# EAGLE board 511_outin_things_imx7 (EAGLE 9.2.2)
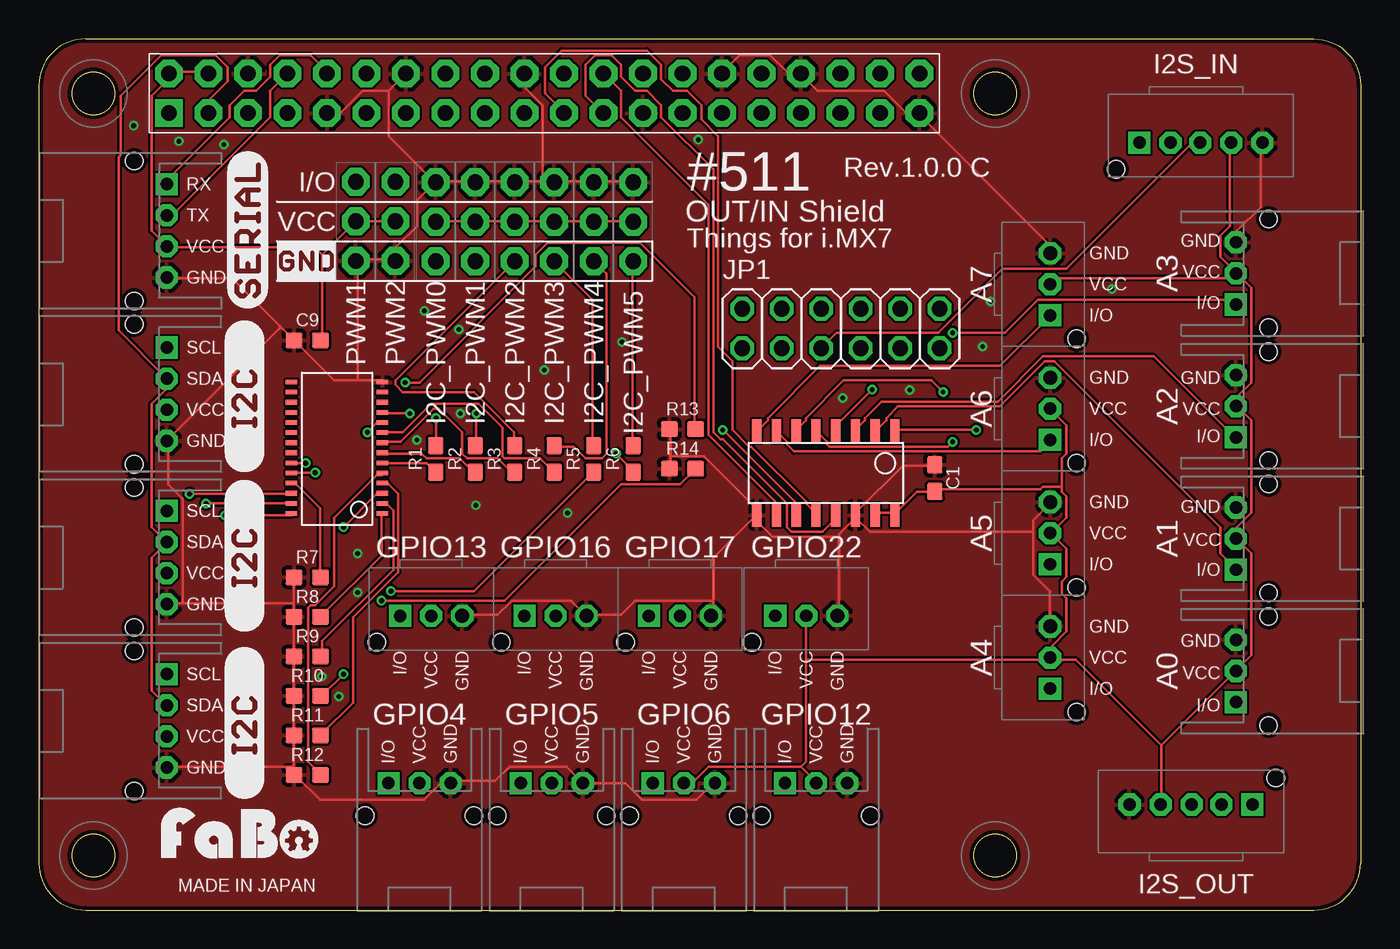
[diagram p0: board, top side]
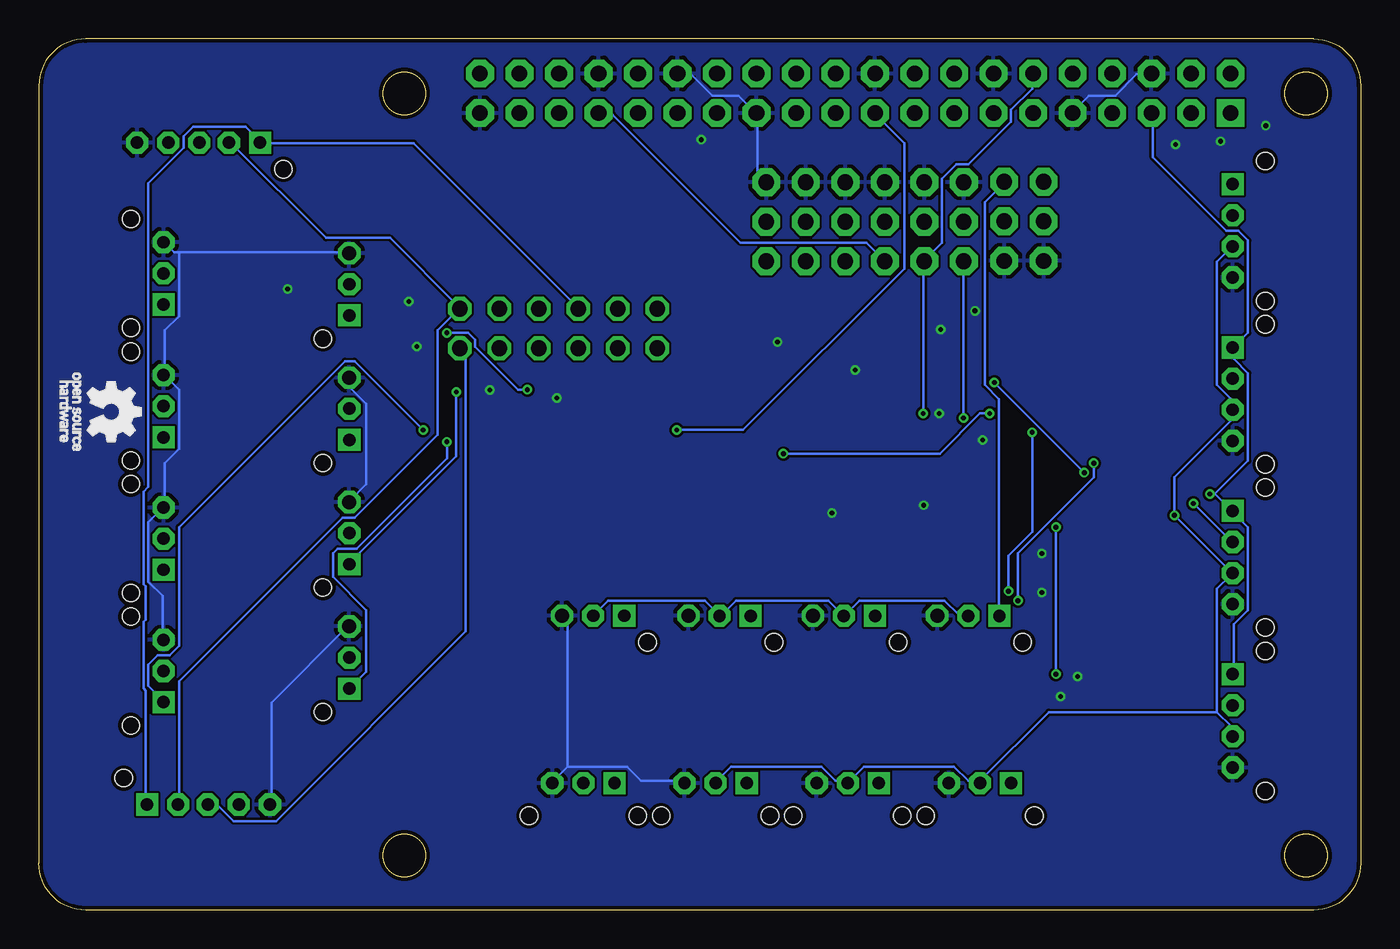
[diagram p1: board, bottom side, seen from below]

Size 85 x 56 mm. Coordinates in mm from the lower left corner, seen from the top.
Copper layers (1*16): Top 0.035mm / dielectric 1.5mm / Bottom 0.035mm
Design rules "Elecrow_2-layer_eagle_rule": minimum track width 6mil, minimum drill 12mil, track to track 6mil, track to pad 6mil, pad to pad 6mil, via to via 6mil, smd to smd 0mil, copper to edge 10mil, drill to drill 10mil, minimum pad ring 10mil, minimum via ring 6mil, stop-mask expansion 2mil, vias tented up to drill 100mil, thermal gap 10mil

## Footprints (pad centres in the part's own frame; a part is rotated, then mirrored left to right if it is on the bottom)
FABO_BRICK_3PIN_S03B-PASK-2 = drill 0.8 pad 1.422 octagon: GND -2,0; VCC 0,0 | drill 0.8 pad 1.422 square: I/O 2,0 | hole 1.1: 3.5,2.1; -3.5,2.1
FABO_BRICK_3PIN_B03B-PASK-1 = drill 0.9 pad 1.422 octagon: GND -2,0 | drill 0.8 pad 1.422 square: I/O 2,0 | drill 0.8 pad 1.422 octagon: VCC 0,0 | hole 1.1: 3.5,1.7
0603 = smd 1.1 x 1: 1 -0.85,0; 2 0.85,0
FABO_BRICK_3PIN_HEADER = drill 1 pad 1.778 octagon: GND -2.54,0; I/O 2.54,0; VCC 0,0
FABO_BRICK_I2C_S04B-PASK-2 = drill 0.8 pad 1.422 octagon: GND -3,0; SDA 1,0; VCC -1,0 | drill 0.8 pad 1.422 square: SCL 3,0 | hole 1.1: 4.5,2.1; -4.5,2.1
FABO_BRICK_I2S_B05B-PARK-1 = drill 0.8 pad 1.422 octagon: BCLK 1.635,2.54; DATA -0.27,2.54; GND -4.27,2.54; VCC -2.27,2.54 | drill 0.8 pad 1.422 square: WS 3.635,2.54 | hole 1.1: 5.135,4.24
MICROCHIP-MCP3008 = smd 0.6 x 1.5: 1 -4.445,-2.7; 2 -3.175,-2.7; 3 -1.905,-2.7; 4 -0.635,-2.7; 5 0.635,-2.7; 6 1.905,-2.7; 7 3.175,-2.7; 8 4.445,-2.7; 9 4.445,2.7; 10 3.175,2.7; 11 1.905,2.7; 12 0.635,2.7; 13 -0.635,2.7; 14 -1.905,2.7; 15 -3.175,2.7; 16 -4.445,2.7
2X06 = drill 1.016 octagon: 1 -6.35,-1.27; 2 -6.35,1.27; 3 -3.81,-1.27; 4 -3.81,1.27; 5 -1.27,-1.27; 6 -1.27,1.27; 7 1.27,-1.27; 8 1.27,1.27; 9 3.81,-1.27; 10 3.81,1.27; 11 6.35,-1.27; 12 6.35,1.27
FABO_BRICK_SERIAL_S04B-PASK-2 = drill 0.8 pad 1.422 octagon: GND -3,0; TX 1,0; VCC -1,0 | drill 0.8 pad 1.422 square: RX 3,0 | hole 1.1: 4.5,2.1; -4.5,2.1
RASPBERRY_PI_B+ = drill 1 pad 1.778 square: 1 0,-2.54 | drill 1 pad 1.778 octagon: 2 0,0; 3 2.54,-2.54; 4 2.54,0; 5 5.08,-2.54; 6 5.08,0; 7 7.62,-2.54; 8 7.62,0; 9 10.16,-2.54; 10 10.16,0; 11 12.7,-2.54; 12 12.7,0; 13 15.24,-2.54; 14 15.24,0; 15 17.78,-2.54; 16 17.78,0; 17 20.32,-2.54; 18 20.32,0; 19 22.86,-2.54; 20 22.86,0; 21 25.4,-2.54; 22 25.4,0; 23 27.94,-2.54; 24 27.94,0; 25 30.48,-2.54; 26 30.48,0; 27 33.02,-2.54; 28 33.02,0; 29 35.56,-2.54; 30 35.56,0; 31 38.1,-2.54; 32 38.1,0; 33 40.64,-2.54; 34 40.64,0; 35 43.18,-2.54; 36 43.18,0; 37 45.72,-2.54; 38 45.72,0; 39 48.26,-2.54; 40 48.26,0
PCA9685 = smd 0.3 x 0.75: 1 -4.15,-2.93; 2 -3.5,-2.93; 3 -2.85,-2.93; 4 -2.2,-2.93; 5 -1.55,-2.93; 6 -0.9,-2.93; 7 -0.25,-2.93; 8 0.4,-2.93; 9 1.05,-2.93; 10 1.7,-2.93; 11 2.35,-2.93; 12 3,-2.93; 13 3.65,-2.93; 14 4.3,-2.93; 15 4.3,2.92; 16 3.65,2.92; 17 3,2.92; 18 2.35,2.92; 19 1.7,2.92; 20 1.05,2.92; 21 0.4,2.92; 22 -0.25,2.92; 23 -0.9,2.92; 24 -1.55,2.92; 25 -2.2,2.92; 26 -2.85,2.92; 27 -3.5,2.92; 28 -4.15,2.92

## Placement (x,y rotation side)
A0  [FABO_BRICK_3PIN_S03B-PASK-2]  76.98,15.36 270 top
A1  [FABO_BRICK_3PIN_S03B-PASK-2]  76.98,23.88 270 top
A2  [FABO_BRICK_3PIN_S03B-PASK-2]  76.98,32.39 270 top
A3  [FABO_BRICK_3PIN_S03B-PASK-2]  76.98,40.93 270 top
A4  [FABO_BRICK_3PIN_B03B-PASK-1]  65.03,16.23 270 top
A5  [FABO_BRICK_3PIN_B03B-PASK-1]  65.03,24.23 270 top
A6  [FABO_BRICK_3PIN_B03B-PASK-1]  65.03,32.23 270 top
A7  [FABO_BRICK_3PIN_B03B-PASK-1]  65.03,40.23 270 top
C1  0.1uF  [0603]  57.62,27.76 270 top
C9  0.1uF  [0603]  17.26,36.63 0 top
GPIO4  [FABO_BRICK_3PIN_S03B-PASK-2]  24.48,8.16 180 top
GPIO5  [FABO_BRICK_3PIN_S03B-PASK-2]  32.98,8.16 180 top
GPIO6  [FABO_BRICK_3PIN_S03B-PASK-2]  41.48,8.16 180 top
GPIO12  [FABO_BRICK_3PIN_S03B-PASK-2]  49.98,8.16 180 top
GPIO13  [FABO_BRICK_3PIN_B03B-PASK-1]  25.23,18.91 180 top
GPIO16  [FABO_BRICK_3PIN_B03B-PASK-1]  33.23,18.91 180 top
GPIO17  [FABO_BRICK_3PIN_B03B-PASK-1]  41.23,18.91 180 top
GPIO22  [FABO_BRICK_3PIN_B03B-PASK-1]  49.36,18.92 180 top
GPIO23S  [FABO_BRICK_3PIN_HEADER]  20.38,44.28 90 top
GPIO24S  [FABO_BRICK_3PIN_HEADER]  22.91,44.28 90 top
I2C1  [FABO_BRICK_I2C_S04B-PASK-2]  8.23,33.16 90 top
I2C2  [FABO_BRICK_I2C_S04B-PASK-2]  8.23,22.66 90 top
I2C3  [FABO_BRICK_I2C_S04B-PASK-2]  8.23,12.16 90 top
I2C_PWM0  [FABO_BRICK_3PIN_HEADER]  25.52,44.25 270 top
I2C_PWM1  [FABO_BRICK_3PIN_HEADER]  28.05,44.25 270 top
I2C_PWM2  [FABO_BRICK_3PIN_HEADER]  30.59,44.25 270 top
I2C_PWM3  [FABO_BRICK_3PIN_HEADER]  33.13,44.25 270 top
I2C_PWM4  [FABO_BRICK_3PIN_HEADER]  35.67,44.25 270 top
I2C_PWM5  [FABO_BRICK_3PIN_HEADER]  38.21,44.25 270 top
I2S_IN  FABO_BRICK_I2STOP  [FABO_BRICK_I2S_B05B-PARK-1]  74.41,51.87 180 top
I2S_OUT  FABO_BRICK_I2STOP  [FABO_BRICK_I2S_B05B-PARK-1]  74.41,4.24 0 top
IC1  [MICROCHIP-MCP3008]  50.61,28.09 180 top
JP1  [2X06]  51.58,37.38 0 top
R1  220  [0603]  25.52,29.01 90 top
R2  220  [0603]  28.05,29.01 90 top
R3  220  [0603]  30.59,29.01 90 top
R4  220  [0603]  33.13,29.01 90 top
R5  220  [0603]  35.67,29.01 90 top
R6  220  [0603]  38.21,29.01 90 top
R7  10K  [0603]  17.26,21.39 0 top
R8  10K  [0603]  17.26,18.85 0 top
R9  10K  [0603]  17.26,16.31 0 top
R10  10K  [0603]  17.26,13.77 0 top
R11  10K  [0603]  17.26,11.23 0 top
R12  10K  [0603]  17.26,8.69 0 top
R13  10K  [0603]  41.39,30.91 0 top
R14  10K  [0603]  41.39,28.37 0 top
SERIAL  [FABO_BRICK_SERIAL_S04B-PASK-2]  8.23,43.66 90 top
U1  [RASPBERRY_PI_B+]  8.37,53.77 0 top
U$2  [LOGO_SILK_I2C]  14.48,17.91 90 top
U$3  [LOGO_SILK_SERIAL2]  14.73,38.66 90 top
U$4  [LOGO_OSHW_T_MS_BOTTOM]  80.38,32.01 90 top
U$5  [LOGO_SILK_I2C]  14.48,7.16 90 top
U$6  [LOGO_SILK_I2C]  14.48,28.16 90 top
U$7  [LOGO_SILK_GND]  15.29,40.47 0 top
U$9  PCA9685  [PCA9685]  19.16,29.64 90 top
U$14  [LOGO_FABO_MS]  12.92,2.94 0 top

## Library data of the parts
A0 A1-A7 GPIO4-GPIO6 GPIO12 GPIO13 GPIO16 GPIO17 GPIO22 GPIO23S GPIO24S I2C1-I2C3 I2C_PWM0 I2C_PWM1-I2C_PWM5 I2S_IN I2S_OUT SERIAL = FaBo-Template
C1 C9 = FaBo-Capacitor
IC1 = FaBo-ADC
JP1 = pinhead
R1-R14 = FaBo-Resistors
U1 = FaBo-Boards
U$2-U$7 U$14 = FaBo-etc
U$9 = FaBo-Motor

## Nets
5V: A0.VCC A1.VCC A2.VCC A3.VCC A4.VCC A5.VCC A6.VCC A7.VCC C1.2 C9.2 GPIO4.VCC GPIO5.VCC GPIO6.VCC GPIO12.VCC GPIO13.VCC GPIO16.VCC GPIO17.VCC GPIO22.VCC GPIO23S.VCC GPIO24S.VCC I2C1.VCC I2C2.VCC I2C3.VCC I2S_IN.VCC I2S_OUT.VCC IC1.15 IC1.16 SERIAL.VCC U1.2 U1.4 U$9.28
CE0: IC1.10 U1.24
CH0: A0.I/O IC1.1
CH1: A1.I/O IC1.2
CH2: A2.I/O IC1.3
CH3: A3.I/O IC1.4
CH4: A4.I/O IC1.5
CH5: A5.I/O IC1.6
CH6: A6.I/O IC1.7
CH7: A7.I/O IC1.8
CTS: U1.11
GND: A0.GND A1.GND A2.GND A3.GND A4.GND A5.GND A6.GND A7.GND C1.1 C9.1 GPIO4.GND GPIO5.GND GPIO6.GND GPIO12.GND GPIO13.GND GPIO16.GND GPIO17.GND GPIO22.GND GPIO23S.GND GPIO24S.GND I2C1.GND I2C2.GND I2C3.GND I2C_PWM0.GND I2C_PWM1.GND I2C_PWM2.GND I2C_PWM3.GND I2C_PWM4.GND I2C_PWM5.GND I2S_IN.GND I2S_OUT.GND IC1.9 IC1.14 R7.1 R8.1 R9.1 R10.1 R11.1 R12.1 R13.1 R14.1 SERIAL.GND U1.6 U1.9 U1.14 U1.20 U1.25 U1.30 U1.34 U1.39 U$9.14
GPIO1_IO10: U1.15
GPIO2_IO00: U1.35
GPIO2_IO01: U1.29
GPIO2_IO02: U1.31
GPIO2_IO03: U1.13
GPIO2_IO05: U1.37
GPIO2_IO07: U1.36
GPIO4: GPIO4.I/O
GPIO5: GPIO5.I/O
GPIO5_IO00: U1.22
GPIO6: GPIO6.I/O
GPIO6_IO12: U1.18
GPIO6_IO13: U1.16
GPIO6_IO14: U1.40
GPIO6_IO15: U1.38
GPIO12: GPIO12.I/O
GPIO13: GPIO13.I/O GPIO24S.I/O
GPIO16: GPIO16.I/O
GPIO17: GPIO17.I/O
GPIO18: GPIO23S.I/O
GPIO22: GPIO22.I/O
I2S_BCLK: I2S_IN.BCLK I2S_OUT.BCLK JP1.12
I2S_LRCLK: I2S_IN.WS I2S_OUT.WS JP1.6
I2S_SDIN: I2S_IN.DATA JP1.5
I2S_SDOUT: I2S_OUT.DATA JP1.11
LED0: R1.1 U$9.6
LED1: R2.1 U$9.7
LED2: R3.1 U$9.8
LED3: R4.1 U$9.9
LED4: R5.1 U$9.10
LED5: R6.1 U$9.11
MISO: IC1.12 U1.21
MOSI: IC1.11 U1.19
N$7: R14.2 U$9.23
N$8: R7.2 U$9.25
N$9: R8.2 U$9.1
N$10: R9.2 U$9.2
N$11: R10.2 U$9.3
N$12: R11.2 U$9.4
N$13: R12.2 U$9.5
N$14: R13.2 U$9.24
PWM0: I2C_PWM0.I/O R1.2
PWM1: I2C_PWM1.I/O R2.2 U1.12
PWM2: I2C_PWM2.I/O R3.2 U1.33
PWM3: I2C_PWM4.I/O R4.2
PWM4: I2C_PWM3.I/O R5.2
PWM5: I2C_PWM5.I/O R6.2
RTS: U1.7
RX: SERIAL.RX U1.10
SCL: I2C1.SCL I2C2.SCL I2C3.SCL U1.5 U$9.26
SCLK: IC1.13 U1.23
SDA: I2C1.SDA I2C2.SDA I2C3.SDA U1.3 U$9.27
TX: SERIAL.TX U1.8
VCC: I2C_PWM0.VCC I2C_PWM1.VCC I2C_PWM2.VCC I2C_PWM3.VCC I2C_PWM4.VCC I2C_PWM5.VCC

## Tracks (layer width: path | path; a pad name or v marks a point on that pad's centre or on a via)
5V  (via drill 0.3)
  Top 0.152: v11.98,25.37 16.24,25.37 U$9.28 | U1.4 10.91,53.87 8.47,53.87 U1.2 8.32,53.72 8.32,53.41 7.25,52.35 7.25,43.66 8.17,42.75 SERIAL.VCC 8.32,42.59 17.77,42.59 18.23,42.14 | 18.23,42.14 18.23,36.65 C9.2 | 18.23,42.14 GPIO23S.VCC 20.51,44.27 22.8,44.27 GPIO24S.VCC | 49.01,9.22 43.07,9.22 42.15,8.3 41.54,8.3 GPIO6.VCC | 49.01,9.22 49.92,8.3 GPIO12.VCC | 49.31,16.08 49.31,9.52 49.01,9.22 | 49.31,16.08 49.31,18.82 GPIO22.VCC | IC1.15 53.89,25.53 54.95,25.53 IC1.16 55.11,25.53 56.48,26.9 57.54,26.9 C1.2 57.7,27.05 64.4,27.05 64.56,27.2 65.77,27.2 | A4.VCC 65.16,16.23 65.16,16.99 66.08,17.91 66.08,20.04 65.77,20.34 65.77,21.11 66.08,21.41 66.08,23.24 65.16,24.15 A5.VCC 65.16,24.31 66.08,25.22 66.08,26.59 65.77,26.9 65.77,27.2 | 65.77,27.2 65.77,29.03 66.08,29.34 66.08,31.16 65.16,32.08 A6.VCC | 72.17,10.59 72.17,6.78 I2S_OUT.VCC | 72.17,10.59 76.9,15.31 A0.VCC 77.05,15.47 77.97,16.38 77.97,22.93 77.05,23.85 A1.VCC 77.05,24 77.05,24.61 77.97,25.53 77.97,31.47 77.05,32.38 A2.VCC 77.05,32.54 77.05,32.99 77.97,33.91 77.97,40 77.05,40.92 A3.VCC | A7.VCC 65.64,40.61 76.59,40.61 76.9,40.92 A3.VCC | I2S_IN.VCC 76.59,49.3 76.59,43.97 75.98,43.36 75.98,41.98 76.9,41.07 A3.VCC | 72.17,10.59 66.69,16.08 65.16,16.08 A4.VCC | 49.31,16.08 65.01,16.08 A4.VCC
  Bottom 0.152: 9.23,12.72 8.32,11.81 8.32,11.2 I2C3.VCC | 9.23,12.72 9.23,20.65 8.32,21.56 I2C2.VCC 8.32,21.72 v11.98,25.37 11.98,27.81 8.32,31.47 8.32,32.08 I2C1.VCC 8.32,32.23 8.32,32.84 9.23,33.76 9.23,41.68 8.32,42.59 SERIAL.VCC | GPIO13.VCC 25.24,18.97 25.84,18.97 26.76,19.89 32.25,19.89 33.16,18.97 GPIO16.VCC 33.31,18.97 34.23,19.89 40.17,19.89 41.08,18.97 GPIO17.VCC 41.24,18.97 42.15,19.89 48.4,19.89 49.31,18.97 GPIO22.VCC | GPIO6.VCC 41.39,8.3 40.48,9.22 34.68,9.22 33.77,8.3 33.01,8.3 GPIO5.VCC 32.86,8.3 31.94,9.22 26.15,9.22 25.24,8.3 24.63,8.3 GPIO4.VCC 24.47,8.3 20.05,12.72 9.23,12.72
CE0
  Top 0.152: U1.24 37.43,52.65 37.43,50.98 43.07,45.34 43.07,30.55 47.33,26.29 47.33,25.53 IC1.10
CH0  (via drill 0.3)
  Top 0.152: v60.29,30.86 55.11,30.86 IC1.1
  Bottom 0.152: v60.29,30.86 64.71,35.28 65.32,35.28 75.98,24.61 75.98,16.99 76.59,16.38 77.36,16.38 77.97,15.77 77.97,14.4 77.05,13.49 A0.I/O
CH1
  Top 0.152: IC1.2 53.89,30.86 54.5,31.47 54.5,31.62 55.26,32.38 61.81,32.38 64.71,35.28 65.32,35.28 75.98,24.61 75.98,22.93 76.9,22.02 A1.I/O
CH2
  Top 0.152: IC1.3 52.51,30.86 53.12,31.47 53.12,31.62 54.19,32.69 61.66,32.69 64.56,35.58 71.72,35.58 76.9,30.4 A2.I/O
CH3  (via drill 0.3)
  Top 0.152: v53.58,33.45 51.3,31.16 51.3,30.86 IC1.4 | v58.76,37.11 62.12,37.11 64.25,39.24 76.59,39.24 76.9,38.94 A3.I/O
  Bottom 0.152: v53.58,33.45 54.19,33.45 56.93,36.19 56.93,36.65 57.39,37.11 v58.76,37.11
CH4  (via drill 0.3)
  Top 0.152: v58.76,30.1 58.46,29.79 50.84,29.79 50.69,29.95 50.69,30.1 50.08,30.71 IC1.5
  Bottom 0.152: v58.76,30.1 58.76,29.03 64.56,23.24 65.77,23.24 66.08,22.93 66.08,21.41 63.95,19.28 63.95,15.31 65.01,14.25 A4.I/O
CH5  (via drill 0.3)
  Top 0.152: v58.15,33.3 57.39,34.06 51.75,34.06 49.31,31.62 49.31,31.47 48.7,30.86 IC1.6
  Bottom 0.152: v58.15,33.3 58.15,29.18 65.01,22.33 A5.I/O
CH6
  Top 0.152: IC1.7 47.49,30.71 48.1,30.1 48.1,29.95 48.55,29.49 64.4,29.49 65.01,30.1 A6.I/O
CH7
  Top 0.152: IC1.8 46.27,30.86 46.88,31.47 46.88,31.62 50.23,34.97 61.81,34.97 65.01,38.17 A7.I/O
GND  (via drill 0.3)
  Top 0.152: 63.95,24.31 63.95,25.07 65.01,26.14 A5.GND | 63.95,24.31 63.95,21.56 65.01,20.5 65.01,18.36 A4.GND | GPIO6.GND 43.37,8.15 42.3,7.09 38.8,7.09 37.73,8.15 GPIO5.GND 34.84,8.3 33.92,9.22 30.27,9.22 29.35,8.3 26.61,8.3 GPIO4.GND 26.45,8.15 25.84,8.15 24.78,7.09 18.07,7.09 16.55,8.61 R12.1 16.4,8.76 16.4,9.22 | C1.1 57.54,28.57 55.56,28.57 52.51,25.53 IC1.14 | 51.45,24 51.45,24.15 52.51,25.22 | 51.45,24 51.45,18.97 GPIO22.GND | IC1.14 52.51,25.22 | GPIO13.GND 27.37,18.97 29.5,18.97 30.42,19.89 34.23,19.89 35.14,18.97 GPIO16.GND 35.29,18.97 37.43,18.97 38.34,19.89 43.37,19.89 | 40.63,29.18 40.63,30.86 R13.1 | 40.63,29.18 40.63,28.42 R14.1 | 40.63,29.18 42.76,29.18 46.11,25.83 46.11,25.53 IC1.9 | 43.37,19.89 43.37,22.63 45.96,25.22 | 43.37,19.89 43.37,18.97 GPIO17.GND | 45.96,25.22 46.11,25.37 IC1.9 | 51.45,24 47.18,24 45.96,25.22 | 45.96,25.22 IC1.9 | 63.95,24.31 53.43,24.31 52.51,25.22 | 52.51,25.37 IC1.14 | I2S_IN.GND 78.58,49.3 78.58,45.19 77.05,43.66 77.05,43.05 A3.GND | I2C_PWM5.GND 38.19,46.86 35.75,46.86 I2C_PWM4.GND 35.6,46.86 33.16,46.86 I2C_PWM3.GND | U1.30 43.98,53.87 45.05,54.94 47.03,54.94 48.1,53.87 49.01,53.87 U1.34 49.01,53.72 50.08,52.65 54.34,52.65 55.72,51.28 56.63,51.28 U1.39 56.63,51.13 65.01,42.75 65.01,42.29 A7.GND | 16.4,9.22 16.4,11.2 R11.1 16.4,11.35 16.4,13.64 R10.1 16.4,13.79 16.4,16.23 R9.1 16.4,16.38 16.4,18.82 R8.1 16.4,18.97 16.4,19.73 | 16.4,19.73 16.4,21.26 R7.1 | 16.4,9.22 8.32,9.22 I2C3.GND | 16.4,19.73 9.23,19.73 | 9.23,19.73 8.32,19.73 I2C2.GND | 9.23,19.73 9.23,26.44 8.32,27.35 8.32,30.1 I2C1.GND 8.32,30.25 15.48,37.41 15.48,37.57
  Top 0.152: 20.51,34.06 18.99,34.06 16.55,36.5 C9.1 16.4,36.65 15.48,37.57 | 20.51,34.06 22.03,34.06 U$9.14 | 15.48,37.57 12.43,40.61 8.32,40.61 SERIAL.GND | 22.49,52.65 20.82,52.65 19.44,51.28 18.53,51.28 U1.9 | U1.14 22.49,52.65 | 32.4,46.86 33.01,46.86 I2C_PWM3.GND | 32.4,46.86 30.72,46.86 I2C_PWM2.GND 30.57,46.86 28.13,46.86 I2C_PWM1.GND 27.98,46.86 25.54,46.86 I2C_PWM0.GND | 32.4,46.86 32.4,51.74 31.33,52.81 31.33,53.72 U1.20 | 32.4,46.86 I2C_PWM3.GND | I2C_PWM0.GND 25.39,46.71 24.32,45.64 24.32,43.97 22.95,42.59 22.95,41.83 GPIO24S.GND 22.8,41.83 20.51,41.83 GPIO23S.GND 20.51,41.68 20.51,34.06 | 22.49,52.65 22.49,49.76 25.39,46.86 I2C_PWM0.GND
  Bottom 0.152: A6.GND 65.01,34.21 65.01,33.6 63.95,32.54 63.95,27.35 65.01,26.29 A5.GND | I2S_OUT.GND 70.04,6.78 70.04,13.33 65.16,18.21 A4.GND | 50.99,9.22 47.18,9.22 46.27,8.3 43.52,8.3 GPIO6.GND | 50.99,9.22 51.91,8.3 GPIO12.GND | 50.99,9.22 50.99,18.52 51.3,18.82 GPIO22.GND | A0.GND 77.05,17.45 77.05,20.19 77.97,21.11 77.97,24.92 77.05,25.83 A1.GND 76.9,25.98 76.9,28.73 75.98,29.64 75.98,33.45 76.9,34.36 A2.GND 76.9,34.52 76.9,37.26 75.98,38.17 75.98,42.29 | 75.98,42.29 76.29,42.29 76.9,42.9 A3.GND | 75.98,42.29 65.16,42.29 A7.GND | I2C_PWM5.GND 38.34,46.86 38.8,47.32 38.8,51.13 U1.25 38.95,51.28 40.02,52.35 41.7,52.35 43.07,53.72 43.83,53.72 U1.30 | U1.6 13.5,53.72 14.41,53.72 15.79,52.35 17.46,52.35 18.53,51.28 U1.9
  other vias: 32.5,34.72 28.1,26.02 24.8,38.52 20.5,22.92 20.5,20.42 34,25.52 51.7,32.92 69,39.92 60.7,36.22 42.4,49.52 37.5,36.52 27,37.32 24.3,30.22 27.1,31.92 6.1,50.42 9,49.42 11.9,49.22 56,33.42 19.3,13.72 18.2,15.02 61.2,39.12
  pour Bottom: -0.52,-0.84 -0.52,56.31 85.84,56.31 85.84,-0.84
  pour Top: -0.52,-0.84 -0.52,56.31 85.84,56.31 85.84,-0.84
GPIO13
  Bottom 0.152: GPIO13.I/O 23.25,18.97 23.25,32.84 24.17,33.76 24.17,45.49 22.95,46.71 GPIO24S.I/O
I2S_BCLK
  Bottom 0.152: I2S_IN.BCLK 72.63,49.3 66.54,43.2 62.42,43.2 58,38.78 JP1.12 58,38.63 59.37,37.26 59.37,30.55 64.71,25.22 65.47,25.22 75.98,14.71 75.98,6.78 I2S_OUT.BCLK
I2S_LRCLK
  Bottom 0.152: JP1.6 50.38,38.78 60.9,49.3 70.65,49.3 I2S_IN.WS 70.8,49.45 71.72,50.37 75.07,50.37 75.68,49.76 75.68,49 77.97,46.71 77.97,27.2 78.27,26.9 78.27,20.95 78.12,20.8 78.12,18.67 78.27,18.52 78.27,14.25 78.12,14.1 78.12,6.78 I2S_OUT.WS
I2S_SDIN
  Top 0.152: I2S_IN.DATA 74.61,49.3 74.16,49.3 66.08,41.22 61.96,41.22 57.85,37.11 51.3,37.11 50.38,36.19 JP1.5
I2S_SDOUT
  Bottom 0.152: I2S_OUT.DATA 73.55,6.78 72.48,5.71 69.74,5.71 57.54,17.91 57.54,35.74 57.85,36.04 JP1.11
LED0
  Top 0.152: U$9.6 22.19,28.73 24.93,28.73 25.39,28.27 R1.1
LED1
  Top 0.152: U$9.7 22.19,29.34 24.63,29.34 24.93,29.03 27.06,29.03 27.98,28.12 R2.1
LED2
  Top 0.152: U$9.8 22.19,30.1 23.25,30.1 25.39,32.23 25.69,32.23 27.22,30.71 27.22,29.34 27.52,29.03 29.5,29.03 30.27,28.27 30.57,28.27 R3.1
LED3
  Top 0.152: U$9.9 22.19,30.71 23.41,30.71 25.24,32.54 28.28,32.54 29.81,31.01 29.81,29.18 29.96,29.03 32.25,29.03 33.01,28.27 R4.1
LED4  (via drill 0.3)
  Top 0.152: v21.12,30.71 21.73,31.32 22.03,31.32 U$9.10 | v22.64,20.5 27.98,20.5 35.6,28.12 R5.1
  Bottom 0.152: v21.12,30.71 21.12,24.31 22.64,22.78 v22.64,20.5
LED5  (via drill 0.3)
  Top 0.152: v23.86,31.93 22.19,31.93 U$9.11 | v37.12,29.34 38.19,28.27 R6.1
  Bottom 0.152: v23.86,31.93 24.47,31.93 27.06,29.34 v37.12,29.34
MISO
  Top 0.152: IC1.12 49.92,25.53 49.31,26.14 49.31,26.29 45.81,29.79 45.66,29.79 44.59,30.86 44.59,35.28 43.68,36.19 43.68,49.76 42.61,50.82 42.61,51.74 41.7,52.65 40.78,52.65 40.02,53.41 40.02,54.33 39.1,55.24 33.62,55.24 32.55,54.18 32.55,52.5 33.77,51.28 U1.21
MOSI  (via drill 0.3)
  Top 0.152: IC1.11 48.7,26.14 v43.98,30.86
  Bottom 0.152: v43.98,30.86 39.71,30.86 29.35,41.22 29.35,49.3 31.18,51.13 U1.19
N$7  (via drill 0.3)
  Top 0.152: v17.16,28.73 16.4,28.73 U$9.23 | v22.03,19.89 29.96,19.89 37.43,27.35 41.24,27.35 42.15,28.27 R14.2
  Bottom 0.152: v17.16,28.73 17.16,27.81 22.03,22.93 v22.03,19.89
N$8
  Top 0.152: U$9.25 16.4,27.35 16.55,27.35 18.07,25.83 18.07,21.41 R7.2
N$9
  Top 0.152: U$9.1 22.03,25.37 22.03,22.78 18.23,18.97 R8.2
N$10
  Top 0.152: U$9.2 22.19,26.14 22.34,26.14 22.8,25.68 22.8,21.87 18.23,17.3 18.23,16.38 R9.2
N$11  (via drill 0.3)
  Top 0.152: v19.6,24.61 21.73,26.74 22.03,26.74 U$9.3 | v19.6,15.16 18.23,13.79 R10.2
  Bottom 0.152: v19.6,15.16 v19.6,24.61
N$12
  Top 0.152: U$9.4 22.19,27.35 22.49,27.35 23.1,26.74 23.1,21.72 20.21,18.82 20.21,13.33 18.23,11.35 R11.2
N$13
  Top 0.152: U$9.5 22.03,27.96 21.73,27.96 18.99,25.22 18.99,20.8 17.77,19.58 17.46,19.58 17.31,19.43 17.31,9.52 18.07,8.76 R12.2
N$14  (via drill 0.3)
  Top 0.152: v17.77,28.12 16.4,28.12 U$9.24 | v23.56,33.91 24.47,33.91 31.94,41.38 31.94,42.14 32.7,42.9 38.65,42.9 42.15,39.39 42.15,31.01 R13.2
  Bottom 0.152: v23.56,33.91 v17.77,28.12
PWM0  (via drill 0.3)
  Top 0.152: v25.54,31.62 25.54,29.95 R1.2
  Bottom 0.152: v25.54,31.62 25.54,41.68 I2C_PWM0.I/O
PWM1  (via drill 0.3)
  Top 0.152: v28.13,31.93 28.13,29.95 R2.2
  Bottom 0.152: v28.13,31.93 28.13,41.68 I2C_PWM1.I/O 27.98,41.83 26.91,42.9 26.91,47.01 26,47.93 25.24,47.93 22.49,50.67 22.49,51.43 21.12,52.81 21.12,53.72 U1.12
PWM2
  Top 0.152: I2C_PWM2.I/O 22.95,34.06 22.95,33.76 23.41,33.3 27.98,33.3 30.57,30.71 30.57,29.95 R3.2
  Bottom 0.152: I2C_PWM2.I/O 31.79,42.9 39.87,42.9 48.1,51.13 49.01,51.13 U1.33
PWM3
  Top 0.152: R4.2 33.16,29.79 34.38,29.79 35.14,29.03 36.21,29.03 36.51,29.34 36.51,40.92 35.75,41.68 I2C_PWM4.I/O
PWM4
  Top 0.152: I2C_PWM3.I/O 35.6,39.24 35.6,29.95 R5.2
PWM5
  Top 0.152: R6.2 38.19,29.95 38.19,41.68 I2C_PWM5.I/O
RX
  Top 0.152: SERIAL.RX 8.32,46.71 8.32,47.01 12.28,50.98 12.28,51.74 13.2,52.65 13.96,52.65 14.87,53.57 14.87,54.33 15.48,54.94 17.46,54.94 18.53,53.87 U1.10
SCL  (via drill 0.3)
  Top 0.152: v9.69,26.74 16.24,26.74 U$9.26
  Bottom 0.152: 9.39,26.74 v9.69,26.74 | 9.39,26.74 8.32,25.68 I2C2.SCL 8.17,25.53 7.25,24.61 7.25,19.28 8.17,18.36 8.17,15.16 I2C3.SCL | 9.39,26.74 7.25,28.88 7.25,34.52 8.17,35.43 8.17,36.04 I2C1.SCL 8.17,36.19 7.25,37.11 7.25,43.05 7.86,43.66 8.62,43.66 13.35,48.39 13.35,51.13 U1.5
SCLK
  Top 0.152: IC1.13 51.14,25.37 51.14,25.07 50.38,24.31 48.4,24.31 48.1,24.61 48.1,26.14 43.98,30.25 43.83,30.25 43.37,30.71 43.37,47.62 40.02,50.98 40.02,51.74 39.1,52.65 38.34,52.65 37.43,53.57 37.43,54.33 36.82,54.94 35.75,54.94 35.14,54.33 35.14,52.35 36.21,51.28 U1.23
SDA  (via drill 0.3)
  Top 0.152: v10.76,26.14 U$9.27 | I2C3.SDA 8.17,13.18 7.25,14.1 7.25,22.63 8.17,23.54 I2C2.SDA 8.17,23.7 7.25,24.61 7.25,32.54 8.17,33.45 8.17,34.06 I2C1.SDA 8.17,34.21 5.12,37.26 5.12,48.39 5.27,48.54 5.27,52.35 7.86,54.94 11.37,54.94 12.13,54.18 12.13,53.26 10.91,52.04 U1.3
  Bottom 0.152: v10.76,26.14 8.32,23.7 I2C2.SDA
TX
  Top 0.152: U1.8 14.87,52.65 14.87,50.98 8.62,44.73 8.32,44.73 SERIAL.TX
VCC
  Top 0.152: I2C_PWM5.VCC 38.19,44.27 35.75,44.27 I2C_PWM4.VCC 35.6,44.27 33.16,44.27 I2C_PWM3.VCC 33.01,44.27 30.72,44.27 I2C_PWM2.VCC 30.57,44.27 28.13,44.27 I2C_PWM1.VCC 27.98,44.27 25.54,44.27 I2C_PWM0.VCC

## Text on the board
tPlace: RX | I/O | Rev.1.0.0 C | #511 | TX | VCC | OUT/IN Shield | VCC | GND | Things for i.MX7 | GND | GND | VCC | PWM1 | PWM2 | VCC | I/O | I/O | SCL | SDA | GND | GND | VCC | VCC | VCC | GND | I/O | I/O | GND | GND | SCL | VCC | VCC | SDA | I/O | I/O | VCC | GND | GND | I/O | VCC | GND | I/O | VCC | GND | I/O | VCC | GND | I/O | VCC | GND | GND | VCC | SCL | VCC | I/O | SDA | I/O | VCC | GND | I/O | VCC | GND | I/O | VCC | GND | I/O | VCC | GND | I/O | VCC | GND | MADE IN JAPAN